# Altium PCB Gator Stream Transmitter.PcbDoc
Units mil, origin at the board's own origin, x right, y up, seen from the top; angles counter-clockwise.
Board outline 5460 x 2325 mil, 2 copper layers (Top Layer, Bottom Layer); 80 components, 301 nets, 556 pads, 175 vias.
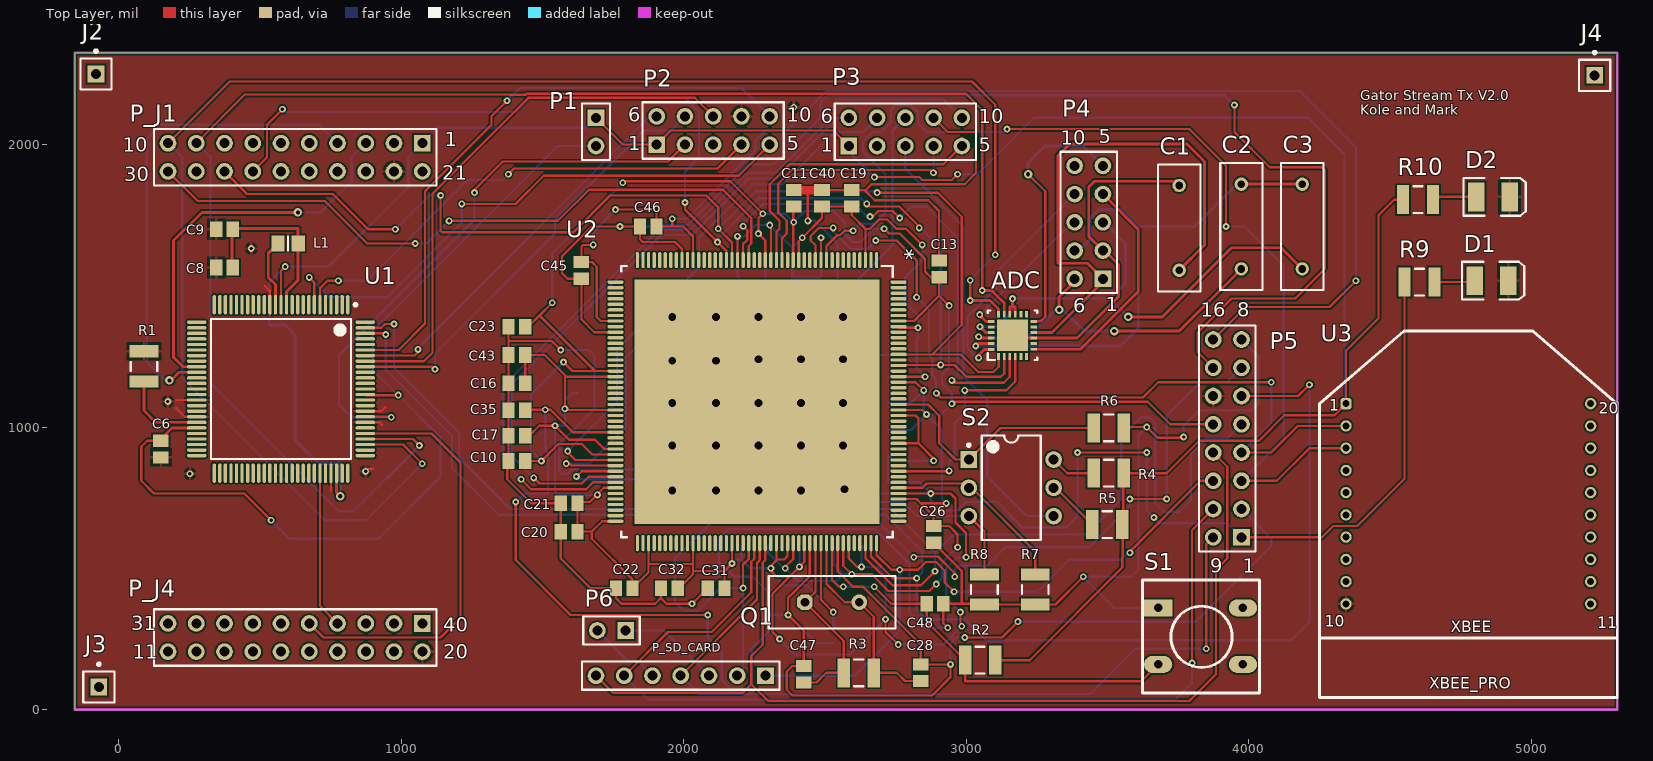
[diagram p0: Top Layer view]
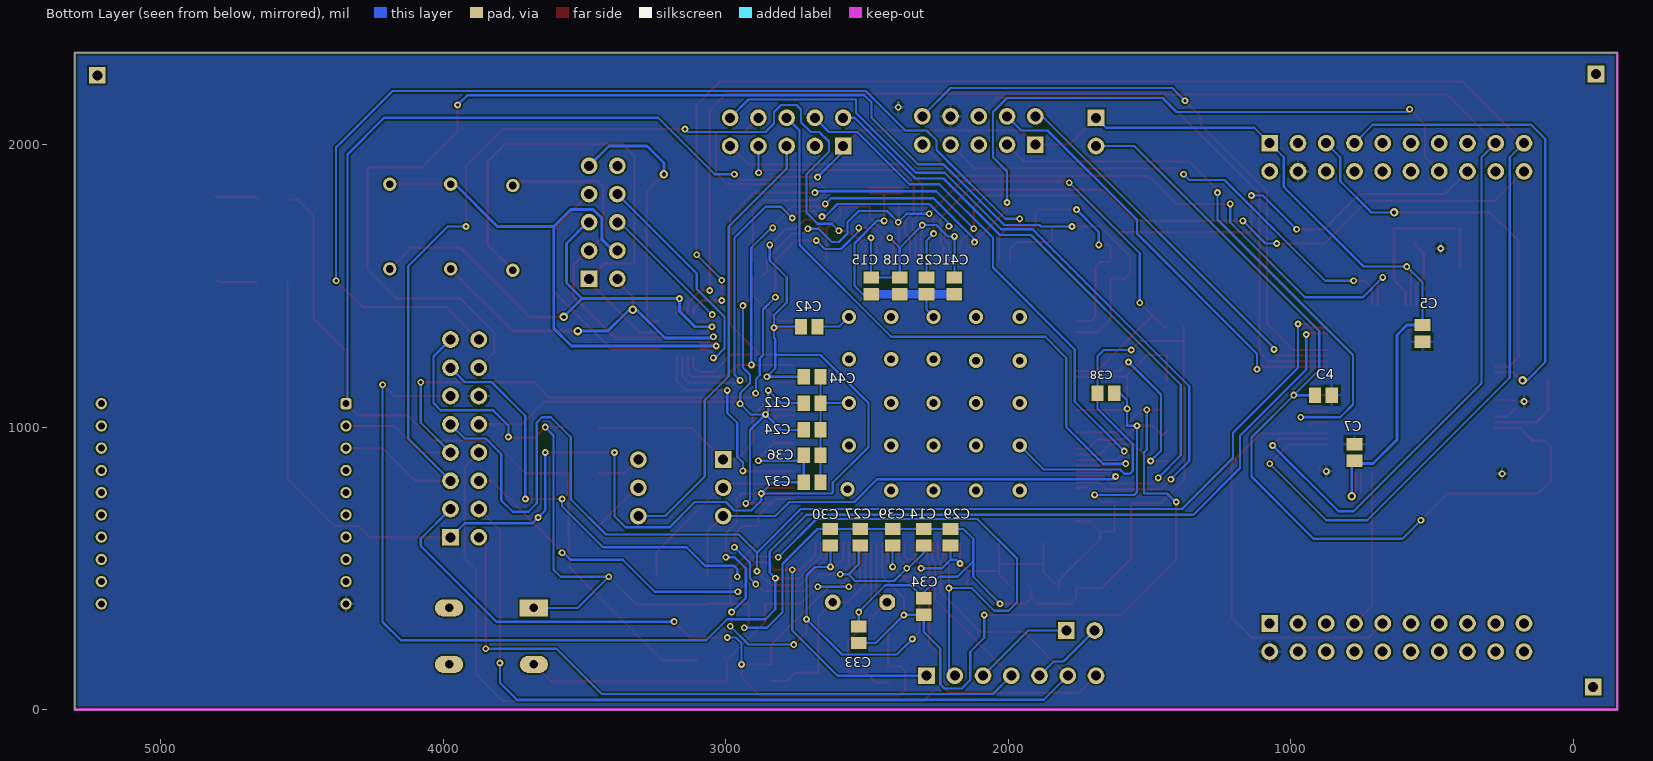
[diagram p1: Bottom Layer view, seen from below]

## Layer stack, top to bottom
Top Solder: solder mask 0.4, Solder Resist, Dk 3.5
Top Layer: signal copper 1.4
Dielectric 1: dielectric 12.6, FR-4, Dk 4.8
Bottom Layer: signal copper 1.4
Bottom Solder: solder mask 0.4, Solder Resist, Dk 3.5

## Board outline
-155,0 -155,2325 5305,2325 5305,0

## Design rules (kind name [scope] priority, off if disabled: settings)
Clearance [InNetClass('All Nets')] p1: gap=6
FabricationTestPointUsage TestPointUsage [All] p1: valid=0 allowmultiple=FALSE
FabricationTestpoint Testpoint [All] p1: side=3 testpointundercomponent=TRUE minsize=40 maxsize=100 preferedsize=60 minholesize=20 maxholesize=40 preferedholesize=32 testpointgrid=1 allowsidetop=TRUE allowsidebottom=TRUE usegrid=TRUE gridtolerance=0.01
HoleSize [All] p1: absolutevalues=TRUE maxlimit=247 minlimit=12 maxpercent=80.000 minpercent=20.000
PasteMaskExpansion PasteMaskExpansion_1 [InComponent('P1')] p1: expansion=-150
PasteMaskExpansion [All] p2: expansion=0
PlaneClearance [All] p1: clearance=5
PlaneConnect [All] p1: planeconnectstyle=Relief reliefexpansion=15 reliefentries=4 reliefconductorwidth=10 reliefairgap=10
PolygonConnect [All] p1: connectstyle=Relief reliefconductorwidth=10 reliefentries=4 polygonreliefangle="90 Angle" airgapwidth=10
RoutingVias RoutingVias_1 [All] p1: holewidth=12 width=24 viastyle="Through Hole" minholewidth=12 minwidth=24 maxholewidth=28 maxwidth=50
RoutingVias [All] p2: holewidth=15 width=30 viastyle="Through Hole" minholewidth=12 minwidth=24 maxholewidth=15 maxwidth=50
SilkToSolderMaskClearance SilkscreenOverComponentPads [IsPad] p1: minsilkscreentomaskgap=10 clearancetoexposedcopper=TRUE
SolderMaskExpansion [All] p1: expansion=5
Width [All] p1: maxlimit=150 minlimit=6 preferedwidth=8
23 further rules are at their usual default settings.

## Classes and differential pairs
component class TMS320F28379D: C10 C11 C12 C13 C14 C15 C16 C17 C18 C19 C20 C21 C22 C23 C24 C25 C26 C27 C28 C29 C30 C31 C32 C33 C34 C35 C36 C37 C38 C39 C40 C41 C42 C43 C44 C45 C46 C47 C48 C? P3 P5 Q1 R2 R3 R4 R5 R6 R7 R8 R? S1 S2 S? U2
component class MSP432: C4 C5 C6 C7 C8 C9 L1 P1 P2 P_J1 P_J4 R1 U1
component class "Audio input ADC": ADC C1 C2 C3 P4
component class "Gator Stream Transmitter Sheet": D1 D2 J2 J3 J4 P6 P_SD_CARD R9 R10 U3

## Components (designator, comment, footprint, x,y, rotation, side; value= is the part's Value field where it differs from the comment)
ADC "TLV320ADC3101IRG" RGE0024F_NV 3164.5,1325 r90 top
C1 "Cap" RAD-0.3 3754.5,1705 r270 top
C2 "Cap" RAD-0.3 3974.5,1710 r270 top
C3 "Cap" RAD-0.3 4189.97,1710 r270 top
C4 "Cap" C0805 885,1113.15 r180 bottom
C5 "C5" C0805 534.35,1331.85 r270 bottom
C6 "Cap" C0805 150,922.36 r270 top
C7 "Cap" C0805 775,910 r90 bottom
C8 "Cap" C0805 375,1565 r0 top
C9 "Cap" C0805 375,1700 r180 top
C10 "Cap" C0805 1410,880 r180 top
C11 "Cap" C0805 2390,1810 r90 top
C12 "Cap" C0805 2695,1085 r180 bottom
C13 "Cap" C0805 2904.5,1560 r90 top
C14 "Cap" C0805 2300,610 r90 bottom
C15 "Cap" C0805 2485,1500 r270 bottom
C16 "Cap" C0805 1410,1155 r180 top
C17 "Cap" C0805 1410,970 r180 top
C18 "Cap" C0805 2385,1500 r270 bottom
C19 "Cap" C0805 2595,1810 r90 top
C20 "Cap" C0805 1595,630 r180 top
C21 "Cap" C0805 1595,730 r180 top
C22 "Cap" C0805 1790,430 r180 top
C23 "Cap" C0805 1410,1355 r180 top
C24 "Cap" C0805 2695,990 r180 bottom
C25 "Cap" C0805 2290,1500 r270 bottom
C26 "Cap" C0805 2885,620 r270 top
C27 "Cap" C0805 2525,610 r90 bottom
C28 "Cap Pol3" C0805 2840,130.47 r270 top
C29 "Cap" C0805 2205,610 r90 bottom
C30 "Cap" C0805 2630,610 r90 bottom
C31 "Cap" C0805 2115,430 r180 top
C32 "Cap" C0805 1950,430 r180 top
C33 "Cap" C0805 2530,265 r90 bottom
C34 "Cap" C0805 2300,365 r90 bottom
C35 "Cap" C0805 1410,1060 r180 top
C36 "Cap" C0805 2695,900 r180 bottom
C37 "Cap" C0805 2695,805 r180 bottom
C38 "Cap" C0805 1655.12,1120 r0 bottom
C39 "Cap" C0805 2410,610 r90 bottom
C40 "Cap" C0805 2490,1810 r90 top
C41 "Cap" C0805 2191.1,1500 r270 bottom
C42 "Cap" C0805 2705,1355.75 r180 bottom
C43 "Cap" C0805 1410,1255.2 r180 top
C44 "Cap" C0805 2695,1178.58 r180 bottom
C45 "Cap" C0805 1638.31,1555 r90 top
C46 "Cap" C0805 1875,1710 r0 top
C47 "Cap Pol3" C0805 2425,125 r270 top
C48 "Cap Pol3" C0805 2890,375 r0 top
D1 "LED3" 3.5X2.8X1.9 4860,1518.15 r0 top
D2 "LED3" 3.5X2.8X1.9 4865,1815 r0 top
J2 "Mounting Hole 1" PIN1 -80,2250 r0 top
J3 "Mounting hole 2" PIN1 -70,80 r0 top
J4 "Mounting Hole 3" PIN1 5225,2245 r0 top
L1 "LQM21PN4R7NGR" 6-0805_N 600,1650 r180 top
P1 "Analog Jumper" HDR1X2 1690,2095 r270 top
P2 "Header 5X2A" HDR2X5_CEN 1905,2000 r0 top
P3 "Header 5X2A" HDR2X5_CEN 2585,1995 r0 top
P4 "Header 5X2A" HDR2X5_CEN 3484.5,1525 r90 top
P5 "Header 8X2A" HDR2X8_CEN 3975,610 r90 top
P6 "SD Power" HDR1X2 1795,280 r180 top
P_J1 "Header 10X2A" HDR2X10_CEN 1075,2005 r180 top
P_J4 "Header 10X2A" HDR2X10_CEN 1075,305 r180 top
P_SD_CARD "Header 7" HDR1X7 2290,120 r180 top
Q1 "10MHZ" HC-49U 2525.75,380 r0 top
R1 "Res3" 14-1210 90,1215 r270 top
R2 "Res3" 14-1210 3050,175 r0 top
R3 "Res3" 14-1210 2620,130 r0 top
R4 "Res3" 14-1210 3505,836.77 r0 top
R5 "Res3" 14-1210 3500,655 r0 top
R6 "Res3" 14-1210 3505,997.2 r180 top
R7 "Res3" 14-1210 3245,425 r90 top
R8 "Res3" 14-1210 3065,425 r90 top
R9 "Res3" 14-1210 4605,1513.23 r180 top
R10 "Res3" 14-1210 4600,1805 r180 top
S1 "SW-PB" "SW PB" 3680,360 r0 top
S2 "SW DIP-3" DIP-6 3160,785 r0 top
U1 "XMS432P401RIPZR" PZ0100A_N 575,1135 r270 top
U2 "TMS320F28379DPTP" PTP0176F_N 2260,1090 r270 top
U3 "XBEE" XBEE/PRO 4310,1515 r0 top

## Footprints (in the part's own frame and the unit in brackets; to place one, negate y for a bottom-side part, rotate by r counter-clockwise, add the part's x,y. Pads: shape width x height; smd on the part's side, far side on the other; paste and mask are expansions set on the pad)
3.5X2.8X1.9 [mm] "SM LED; 2 C-Bend Leads; Body 3.5 x 2.8 x 1.9 mm, inc leads (LxWxH typ)"
  rect 1.5x2.6 smd: 1(-1.5,0) 2(1.5,0)
  silkscreen extent -2.65,-1.7 2.95,1.7
6-0805_N [mm] "Chip Resistor, Body 2.0x1.2mm, IPC Medium Density"
  rect 1.2x1.4 smd: 1(-0.9,0) 2(0.9,0)
  silkscreen extent 0,-0.6 0,0.6, body extent -1.07,-0.7 1.07,0.7, height 0.7
14-1210 [mm] "Chip Resistor, Body 3.2x2.5mm, IPC High Density"
  rect 1.1x2.6 smd: 1(-1.35,0) 2(1.35,0)
  silkscreen extent -0.4,-1.2 0.4,1.2, body extent -1.68,-1.32 1.68,1.32, height 0.9
C0805 [mm] "Chip Capacitor, Body 2.0x1.3mm, IPC High Density"
  rect 1.1x1.4 smd: 1(-0.75,0) 2(0.75,0)
  body extent -1.1,-0.72 1.1,0.72, height 1.4
DIP-6 [mm] "DIP; 6 Leads; Row Spacing 7.62 mm; Pitch 2.54 mm"
  rect 1.5x1.5 hole 0.9: 1(-3.81,2.54)
  round 1.5 hole 0.9: 2(-3.81,0) 3(-3.81,-2.54) 4(3.81,-2.54) 5(3.81,0) 6(3.81,2.54)
  silkscreen extent -3.93,-4.7 2.65,4.7, body extent -3.55,-4.7 3.55,4.7, height 5.46
HC-49U [mm] "Quartz Crystal, Thru-Hole; 2 Leads; Body 11.35 x 4.65 x 13.46 mm (LxWxH max)"
  oct 1.4x1.4 hole 0.8: 1(-2.44,0)
  round 1.4 hole 0.8: 2(2.44,0)
  silkscreen extent -5.7,-2.35 5.7,2.35
HDR1X2 [mm] "Connector; Header; 2 Position"
  rect 1.5x1.5 hole 0.9: 1(0,0)
  round 1.5 hole 0.9: 2(2.54,0)
  silkscreen extent -1.27,-1.27 3.81,1.27
HDR1X7 [mm] "Connector; Header; 7 Position"
  rect 1.5x1.5 hole 0.9: 1(0,0)
  round 1.5 hole 0.9: 2(2.54,0) 3(5.08,0) 4(7.62,0) 5(10.16,0) 6(12.7,0) 7(15.24,0)
  silkscreen extent -1.27,-1.27 16.51,1.27
HDR2X5_CEN [mm] "Connector; Header; 5x2 Position"
  rect 1.5x1.5 hole 0.9: 1(0,0)
  round 1.5 hole 0.9: 2(2.54,0) 3(5.08,0) 4(7.62,0) 5(10.16,0) 6(0,2.54) 7(2.54,2.54) 8(5.08,2.54) 9(7.62,2.54) 10(10.16,2.54)
  silkscreen extent -1.27,-1.27 11.43,3.81
HDR2X8_CEN [mm] "Connector; Header; 8x2 Position"
  rect 1.5x1.5 hole 0.9: 1(0,0)
  round 1.5 hole 0.9: 2(2.54,0) 3(5.08,0) 4(7.62,0) 5(10.16,0) 6(12.7,0) 7(15.24,0) 8(17.78,0) 9(0,2.54) 10(2.54,2.54) 11(5.08,2.54) 12(7.62,2.54) 13(10.16,2.54) 14(12.7,2.54) 15(15.24,2.54) 16(17.78,2.54)
  silkscreen extent -1.27,-1.27 19.05,3.81
HDR2X10_CEN [mm] "Connector; Header; 10x2 Position"
  rect 1.5x1.5 hole 0.9: 1(0,0)
  round 1.5 hole 0.9: 2(2.54,0) 3(5.08,0) 4(7.62,0) 5(10.16,0) 6(12.7,0) 7(15.24,0) 8(17.78,0) 9(20.32,0) 10(22.86,0) 11(0,2.54) 12(2.54,2.54) 13(5.08,2.54) 14(7.62,2.54) 15(10.16,2.54) 16(12.7,2.54) 17(15.24,2.54) 18(17.78,2.54) 19(20.32,2.54) 20(22.86,2.54)
  silkscreen extent -1.27,-1.27 24.13,3.81
PIN1 [mm] "Connector; Plug"
  rect 1.5x1.5 hole 0.9: 1(0,0)
  silkscreen extent -1.4,-1.4 1.4,2.17
PTP0176F_N [mm]
  oval 1.45x0.3 smd paste+0 mask+0.051: 1(-12.725,10.75) 2(-12.725,10.25) 3(-12.725,9.75) 4(-12.725,9.25) 5(-12.725,8.75) 6(-12.725,8.25) 7(-12.725,7.75) 8(-12.725,7.25) 9(-12.725,6.75) 10(-12.725,6.25) 11(-12.725,5.75) 12(-12.725,5.25) 13(-12.725,4.75) 14(-12.725,4.25) 15(-12.725,3.75) 16(-12.725,3.25) 17(-12.725,2.75) 18(-12.725,2.25) 19(-12.725,1.75) 20(-12.725,1.25) 21(-12.725,0.75) 22(-12.725,0.25) 23(-12.725,-0.25) 24(-12.725,-0.75) 25(-12.725,-1.25) 26(-12.725,-1.75) 27(-12.725,-2.25) 28(-12.725,-2.75) 29(-12.725,-3.25) 30(-12.725,-3.75) 31(-12.725,-4.25) 32(-12.725,-4.75) 33(-12.725,-5.25) 34(-12.725,-5.75) 35(-12.725,-6.25) 36(-12.725,-6.75) 37(-12.725,-7.25) 38(-12.725,-7.75) 39(-12.725,-8.25) 40(-12.725,-8.75) 41(-12.725,-9.25) 42(-12.725,-9.75) 43(-12.725,-10.25) 44(-12.725,-10.75) 89(12.725,-10.75) 90(12.725,-10.25) 91(12.725,-9.75) 92(12.725,-9.25) 93(12.725,-8.75) 94(12.725,-8.25) 95(12.725,-7.75) 96(12.725,-7.25) 97(12.725,-6.75) 98(12.725,-6.25) 99(12.725,-5.75) 100(12.725,-5.25) 101(12.725,-4.75) 102(12.725,-4.25) 103(12.725,-3.75) 104(12.725,-3.25) 105(12.725,-2.75) 106(12.725,-2.25) 107(12.725,-1.75) 108(12.725,-1.25) 109(12.725,-0.75) 110(12.725,-0.25) 111(12.725,0.25) 112(12.725,0.75) 113(12.725,1.25) 114(12.725,1.75) 115(12.725,2.25) 116(12.725,2.75) 117(12.725,3.25) 118(12.725,3.75) 119(12.725,4.25) 120(12.725,4.75) 121(12.725,5.25) 122(12.725,5.75) 123(12.725,6.25) 124(12.725,6.75) 125(12.725,7.25) 126(12.725,7.75) 127(12.725,8.25) 128(12.725,8.75) 129(12.725,9.25) 130(12.725,9.75) 131(12.725,10.25) 132(12.725,10.75)
  oval 0.3x1.45 smd paste+0 mask+0.051: 45(-10.75,-12.725) 46(-10.25,-12.725) 47(-9.75,-12.725) 48(-9.25,-12.725) 49(-8.75,-12.725) 50(-8.25,-12.725) 51(-7.75,-12.725) 52(-7.25,-12.725) 53(-6.75,-12.725) 54(-6.25,-12.725) 55(-5.75,-12.725) 56(-5.25,-12.725) 57(-4.75,-12.725) 58(-4.25,-12.725) 59(-3.75,-12.725) 60(-3.25,-12.725) 61(-2.75,-12.725) 62(-2.25,-12.725) 63(-1.75,-12.725) 64(-1.25,-12.725) 65(-0.75,-12.725) 66(-0.25,-12.725) 67(0.25,-12.725) 68(0.75,-12.725) 69(1.25,-12.725) 70(1.75,-12.725) 71(2.25,-12.725) 72(2.75,-12.725) 73(3.25,-12.725) 74(3.75,-12.725) 75(4.25,-12.725) 76(4.75,-12.725) 77(5.25,-12.725) 78(5.75,-12.725) 79(6.25,-12.725) 80(6.75,-12.725) 81(7.25,-12.725) 82(7.75,-12.725) 83(8.25,-12.725) 84(8.75,-12.725) 85(9.25,-12.725) 86(9.75,-12.725) 87(10.25,-12.725) 88(10.75,-12.725) 133(10.75,12.725) 134(10.25,12.725) 135(9.75,12.725) 136(9.25,12.725) 137(8.75,12.725) 138(8.25,12.725) 139(7.75,12.725) 140(7.25,12.725) 141(6.75,12.725) 142(6.25,12.725) 143(5.75,12.725) 144(5.25,12.725) 145(4.75,12.725) 146(4.25,12.725) 147(3.75,12.725) 148(3.25,12.725) 149(2.75,12.725) 150(2.25,12.725) 151(1.75,12.725) 152(1.25,12.725) 153(0.75,12.725) 154(0.25,12.725) 155(-0.25,12.725) 156(-0.75,12.725) 157(-1.25,12.725) 158(-1.75,12.725) 159(-2.25,12.725) 160(-2.75,12.725) 161(-3.25,12.725) 162(-3.75,12.725) 163(-4.25,12.725) 164(-4.75,12.725) 165(-5.25,12.725) 166(-5.75,12.725) 167(-6.25,12.725) 168(-6.75,12.725) 169(-7.25,12.725) 170(-7.75,12.725) 171(-8.25,12.725) 172(-8.75,12.725) 173(-9.25,12.725) 174(-9.75,12.725) 175(-10.25,12.725) 176(-10.75,12.725)
  rect 22x22 smd paste-10.987 mask+0.051: 177(0,0)
  silkscreen extent -12.2,-12.2 12.2,12.2, body extent 0,0 0.25,0.25, height 0.25
PZ0100A_N [mm]
  oval 1.75x0.3 smd paste+0 mask+0.051: 1(-7.575,6) 2(-7.575,5.5) 3(-7.575,5) 4(-7.575,4.5) 5(-7.575,4) 6(-7.575,3.5) 7(-7.575,3) 8(-7.575,2.5) 9(-7.575,2) 10(-7.575,1.5) 11(-7.575,1) 12(-7.575,0.5) 13(-7.575,0) 14(-7.575,-0.5) 15(-7.575,-1) 16(-7.575,-1.5) 17(-7.575,-2) 18(-7.575,-2.5) 19(-7.575,-3) 20(-7.575,-3.5) 21(-7.575,-4) 22(-7.575,-4.5) 23(-7.575,-5) 24(-7.575,-5.5) 25(-7.575,-6) 51(7.575,-6) 52(7.575,-5.5) 53(7.575,-5) 54(7.575,-4.5) 55(7.575,-4) 56(7.575,-3.5) 57(7.575,-3) 58(7.575,-2.5) 59(7.575,-2) 60(7.575,-1.5) 61(7.575,-1) 62(7.575,-0.5) 63(7.575,0) 64(7.575,0.5) 65(7.575,1) 66(7.575,1.5) 67(7.575,2) 68(7.575,2.5) 69(7.575,3) 70(7.575,3.5) 71(7.575,4) 72(7.575,4.5) 73(7.575,5) 74(7.575,5.5) 75(7.575,6)
  oval 0.3x1.75 smd paste+0 mask+0.051: 26(-6,-7.575) 27(-5.5,-7.575) 28(-5,-7.575) 29(-4.5,-7.575) 30(-4,-7.575) 31(-3.5,-7.575) 32(-3,-7.575) 33(-2.5,-7.575) 34(-2,-7.575) 35(-1.5,-7.575) 36(-1,-7.575) 37(-0.5,-7.575) 38(0,-7.575) 39(0.5,-7.575) 40(1,-7.575) 41(1.5,-7.575) 42(2,-7.575) 43(2.5,-7.575) 44(3,-7.575) 45(3.5,-7.575) 46(4,-7.575) 47(4.5,-7.575) 48(5,-7.575) 49(5.5,-7.575) 50(6,-7.575) 76(6,7.575) 77(5.5,7.575) 78(5,7.575) 79(4.5,7.575) 80(4,7.575) 81(3.5,7.575) 82(3,7.575) 83(2.5,7.575) 84(2,7.575) 85(1.5,7.575) 86(1,7.575) 87(0.5,7.575) 88(0,7.575) 89(-0.5,7.575) 90(-1,7.575) 91(-1.5,7.575) 92(-2,7.575) 93(-2.5,7.575) 94(-3,7.575) 95(-3.5,7.575) 96(-4,7.575) 97(-4.5,7.575) 98(-5,7.575) 99(-5.5,7.575) 100(-6,7.575)
  silkscreen extent -7.7,-6.3 6.3,6.83, body extent 0,0 0.25,0.25, height 0.25
RAD-0.3 [mm] "Radial Cap, Thru-Hole; 2 Leads; 0.3 in Pin Spacing"
  round 1.2 hole 0.7: 1(-3.81,0) 2(3.81,0)
  silkscreen extent -5.71,-1.91 5.71,1.91
RGE0024F_NV [mm]
  rect 0.6x0.25 smd paste+0 mask+0: 1(-1.9,1.25) 2(-1.9,0.75) 3(-1.9,0.25) 4(-1.9,-0.25) 5(-1.9,-0.75) 6(-1.9,-1.25) 13(1.9,-1.25) 14(1.9,-0.75) 15(1.9,-0.25) 16(1.9,0.25) 17(1.9,0.75) 18(1.9,1.25)
  rect 0.25x0.6 smd paste+0 mask+0: 7(-1.25,-1.9) 8(-0.75,-1.9) 9(-0.25,-1.9) 10(0.25,-1.9) 11(0.75,-1.9) 12(1.25,-1.9) 19(1.25,1.9) 20(0.75,1.9) 21(0.25,1.9) 22(-0.25,1.9) 23(-0.75,1.9) 24(-1.27,1.905)
  rect 2.8x2.8 smd paste-1.387 mask+0: 25(0,0)
  silkscreen extent -2.22,-2.22 2.23,2.22
"SW PB" [mil]
  rect 100x60 hole 30: 1(0,0)
  oval 100x60 hole 30: 2(0,-200) 3(300,-200) 4(300,0)
  silkscreen extent -55,-302 358,98
XBEE/PRO [mil]
  rrect50% 40x40 hole 25: 1(35,-432.09)
  round 40 hole 25: 2(35,-510.83) 3(35,-589.57) 4(35,-668.31) 5(35,-747.05) 6(35,-825.79) 7(35,-904.53) 8(35,-983.27) 9(35,-1062.01) 10(35,-1140.75) 11(901.14,-1140.75) 12(901.14,-1062.01) 13(901.14,-983.27) 14(901.14,-904.53) 15(901.14,-825.79) 16(901.14,-747.05) 17(901.14,-668.31) 18(901.14,-589.57) 19(901.14,-510.83) 20(901.14,-432.09)
  silkscreen extent -59,-1472 995,-175

## Part data
ADC U1 U2: "Imported"
C1 C2 C3: "Capacitor"
C4 C5 C6 C7 C10 C11 C12 C13 C14 C15 C16 C17 C18 C19 C20 C21 C22 C23 C24 C25 C26 C27 C29 C30 C31 C32 C33 C34 C35 C36 C37 C38 C39 C40 C41 C42 C43 C44 C45 C46: library part "Cap Pol3", "Polarized Capacitor (Surface Mount)"
C8 C9: library part "Cap Semi", "Capacitor (Semiconductor SIM Model)"
C28 C47 C48: "Polarized Capacitor (Surface Mount)"
D1 D2: "Typical BLUE SiC LED"
J2 J3 J4: library part Socket, "Socket"
L1: library part Inductor, "Inductor"
P1 P6: library part "Header 2", "Header, 2-Pin"
P2 P3 P4: "Header, 5-Pin, Dual row"
P5: "Header, 8-Pin, Dual row"
P_J1 P_J4: "Header, 10-Pin, Dual row"
P_SD_CARD: "Header, 7-Pin"
Q1: library part ECS-10-13-1, "Crystal Oscillator"
R1 R2 R3 R4 R5 R6 R7 R8 R9 R10: "Resistor"
S1: library part SW-PB_2, "DIGIKEY SW400-ND"
S2: "DIP Switch, 3 Position, SPST"

## Via types
v1: diameter 24, hole 12, Top Layer to Bottom Layer, 143 vias
v2: diameter 50, hole 28, Top Layer to Bottom Layer, 25 vias
v3: diameter 30, hole 15, Top Layer to Bottom Layer, 7 vias

## Nets (pads, with @x,y where several pads share a name; then routed paths per layer and width w, separated by ;. In a path a pad name is that pad's centre, name@x,y a point inside that pad or via, vN(x,y) a via of type N, cw(c..) or ccw(c..) an arc to the next point about the centre after c; other vN are vias at no path point)
3V3: C5.1 C7.1 P1.1 P2.1 P3.1 P_J1.1 R2.2 R4.2 R5.2 R10.2 U1.13 U1.73 U3.1 | length 9070.9
  Top Layer w8: U1.13 575,1553.19 v1(590,1568.19) ; P1.1 1785,2000 P2.1 1955,2050 2530,2050 P3.1 ; v1(2675.47,1885) 2834.53,1885 2844.8,1874.73 2949.73,1874.73 v1(2970,1895) ; R2.2 3225,175 3553.15,503.15 3556.3,650.51 R4.2@3556.3,827.28 ; R4.2 3710,836.77 3825.12,951.89 4036.89,951.89 4126.76,1041.76 4303.84,1041.76 U3.1 4345,1270 4460,1385 4460,1750 4515,1805 R10.2
  Top Layer w10: U1.73 771.85,768.15 v3(784.75,755.25)
  Bottom Layer w8: C5.1 534.35,1512.54 v1(590,1568.19) 743.19,1568.19 1025,1850 1025,1955 P_J1.1 1130,2060 1655,2060 P1.1 ; P3.1 2585,1975.47 v1(2675.47,1885) ; v1(2970,1895) 3040,1895 3240,2095 4210,2095 4340,1965 4340,1087.91 U3.1
  Bottom Layer w10: C5.1 590,1361.38 625,1326.38 625,955 709.28,870.72 784.75,870.72 v3(784.75,755.25)
5V: P_J1.11
ADC_AVDD: ADC.10 C1.2 P4.1 | length 1875.4
  Top Layer w10: ADC.10 3304.34,1334.84 P4.1@3489.5,1520 ; P4.1 3429.5,1580 3324.5,1580 3324.5,1960 3367,2002.5 3782,2002.5 3844.5,1940 3844.5,1645 C1.2
ADC_DVDD: ADC.22 C2.2 P4.6 | length 1260.6
  Top Layer w10: v1(3044.5,1320) 3049.5,1315 ADC.22@3089.54,1315 ; v3(3329.5,1415) 3329.5,1460 P4.6@3389.5,1520 ; v3(3524.5,1340) 3754.5,1340 C2.2
  Bottom Layer w10: v1@3054.5,1315 3215.64,1315 3315.64,1415 v3(3329.5,1415) 3343.36,1415 3418.36,1340 v3(3524.5,1340)
ADC_GPIO: ADC.19 P4.8 | length 523.5
  Top Layer w10: v1(3048.65,1398.09) 3048.65,1395.85 3070.28,1374.21 ADC.19
  Bottom Layer w8: v1(3048.65,1398.09) 3375.56,1725 P4.8
ADC_IOVDD: ADC.15 ADC.16 ADC.21 C3.2 P4.3 | length 1839.6
  Top Layer w10: v1(3049.5,1355) 3069.65,1334.84 ADC.21 ; ADC.16 3154.65,1424.84 3174.18,1424.84 ADC.15@3174.18,1399.96 ; 3164.5,1424.92 v1(3164.5,1455) ; v3(3574.5,1390) 3694.5,1390 3939.5,1635 4114.97,1635 C3.2
  Bottom Layer w10: v1(3049.5,1355) 3109.5,1355 3164.5,1410 v1(3164.5,1455) 3509.5,1455 ; P4.3@3489.5,1725 3564.5,1650 3564.5,1510 3509.5,1455 ; v3(3574.5,1390) 3509.5,1455
ADC_MCLK: ADC.24 P4.9 | length 820.1
  Top Layer w10: v1(3044.5,1245) 3044.5,1255 3064.5,1275 ADC.24
  Bottom Layer w8: v1(3044.5,1245) 3039,1245 3005,1279 3005,1390.24 3103.33,1488.57 3103.33,1543.84 P4.9
ADC_RESET: ADC.4 U2.142 | length 768.5
  Top Layer w8: U2.142 2938.94,843.94 v1(2940,845) ; v1(2995,1130) 3143.15,1130 3174.34,1161.19 ADC.4
  Bottom Layer w8: v1(2940,845) 2940,875 2960,895 2960,1015 2995,1050 v1(2995,1130)
AUDIO_L: ADC.7 P4.4 | length 844.5
  Top Layer w10: ADC.7 3405.28,1275.79 3609.5,1480 3609.5,1700 P4.4@3489.5,1820
AUDIO_R: ADC.12 P4.5 | length 935.9
  Top Layer w8: v3(3219.5,1895) 3280,1834.5 3280,1390.5 3263.71,1374.21 ADC.12
  Bottom Layer w10: v3(3219.5,1895) 3219.5,1935 3279.5,1995 3414.5,1995 P4.5
AVSS: ADC.9 ADC.25 C1.1 P4.2 | length 1190.2
  Top Layer w10: ADC.25@3174.34,1315.16 ADC.9 3393.12,1315.16 3539.5,1461.54 3539.5,1575 P4.2@3489.5,1625 ; P4.2 3434.5,1675 3434.5,1850 3454.5,1870 3739.5,1870 C1.1
BT_I2S_DOUT: P_J1.20 U2.24 | length 2443.7
  Top Layer w8: P_J1.20 280,1800 730,1800 880,1650 v1(1050,1650) ; v1(1170,1730) 1555,1730 1665,1840 2140,1840 2240,1740 2240,1649.53 2230.47,1640 U2.24
  Bottom Layer w8: v1(1050,1650) 1090,1650 v1(1170,1730)
BT_NSHUTD2: U1.21
DSC_SD_CS: P5.12 P_SD_CARD.7 U2.112 | length 3638.3
  Top Layer w8: P_SD_CARD.7 1750,60 2210,60 2240,90 ; U2.112 2289.53,529.68 2280,520.16 2280,229.84 2240,189.84 2240,90 ; P5.12 3925,860 3925,535 3885,495 3885,125 3790,30 2300,30 2240,90
DSC_SD_DIN: P5.7 P_SD_CARD.2 U2.109 | length 3600.8
  Top Layer w8: v1(2210.79,430) 2210.79,513.74 2230.47,533.43 U2.109 ; v1(2815,539.53) 2812.24,542.24 2900.39,542.24 2960,482.64 v1(2960,470) ; v1(3580,745.51) 3708.98,745.51 3709.49,745 v1(3710,745.51)
  Bottom Layer w8: P_SD_CARD.2 2210.79,140.79 v1(2210.79,430) 2130,430 2050,350 2000,350 1970,380 1970,535 2110,675 2679.53,675 v1(2815,539.53) ; v1(2960,470) 2960,497.63 2971.58,509.21 3074.21,509.21 3140,575 3435,575 3580,720 v1(3580,745.51) ; v1(3710,745.51) 3710,1040 3830,1160 3925,1160 P5.7
DSC_SD_DOUT: P5.10 P_SD_CARD.6 U2.110 | length 3466.5
  Top Layer w8: P_SD_CARD.6 1945,275 2100,275 2240,415 2240,522.95 2250.16,533.11 U2.110 ; v1(3800,165) 3800,635 P5.10
  Bottom Layer w8: P_SD_CARD.6 1875,35 3740,35 3800,95 v1(3800,165)
DSC_SD_PRESENT: P5.11 P_SD_CARD.1 U2.132 | length 2263.1
  Top Layer w8: U2.132 2683.23,547.56 2735.79,495 v1(2765,495) 2830,495 2857.32,522.32 2894.09,522.32 2925,491.42 2925,450 v1(2957.79,417.21) ; v1(3580,555) 3580,560 3830,810 P5.11
  Bottom Layer w8: P_SD_CARD.1 2605,120 2765,280 v1(2765,495) ; v1(2957.79,417.21) 3252.21,417.21 3365,530 3550,530 3580,560 v1(3580,555)
DSC_SD_SCLK: P5.9 P_SD_CARD.4 U2.111 | length 2943.5
  Top Layer w8: P_SD_CARD.4 2260,390 2260,518.54 2266,524.54 2266,525.96 2269.84,529.8 U2.111 ; v1(3850,215) 3850,585 P5.9
  Bottom Layer w8: P_SD_CARD.4 2055,55 3440,55 3600,215 v1(3850,215)
DSC_X1: C28.2 Q1.2 R3.2 U2.123 | length 737.2
  Top Layer w8: U2.123 2506.06,444.37 2570.43,380 Q1.2 2673.15,328.66 R3.2 2755,130 2784.06,100.94 C28.2
DSC_X2: C47.2 Q1.1 R3.1 U2.121 | length 687.3
  Top Layer w8: C47.2 2470.47,95.47 2505,130 R3.1 2566.85,242.83 Q1.1 2466.69,417.01 U2.121
DVSS: ADC.23 C2.1 C3.1 P4.7 | length 2011.9
  Top Layer w10: v1(3034.5,1287.17) 3042.8,1295.47 ADC.23 ; C2.1 C3.1
  Bottom Layer w10: v1(3034.5,1287.17) 3542.33,1287.17 ; P4.7@3389.5,1620 3394.5,1620 3439.5,1665 3439.5,1740 3469.5,1770 3549.5,1770 3609.5,1710 ; 3544.5,1285 3609.5,1350 3609.5,1710 ; C2.1 3959.5,1860 3809.5,1710 3609.5,1710
GND: C4.2 C5.2 C6.2 C7.2 C8.1 C9.2 D1.2 D2.2 P2.9 P5.14 P_J1.12 P_J4.11 R1.1 U1.15 U1.40 U1.43 U1.72 U1.82 U1.84 U3.10 | length 521
  Top Layer w8: 204.06,1067.07 234.56,1036.57 U1.43 ; 204.06,1095.63 U1.40 ; 516.42,1500 535.63,1480.79 U1.15 ; 752.17,773.75 U1.72 ; U1.82 924.29,1016.89 932.49,1008.69 ; U1.84 930.27,1056.26 944.04,1070.03 ; v1(874.51,843.24) 884.03,852.77 902.4,852.77
  Top Layer w10: 534.35,1469.4 534.35,1434.51 U1.15
  Bottom Layer w8: v1(2390,2132.47) 2390,2150
  other v1: 252.54,835 174.61,1090.75 470,1632.1
GPIO_72: R7.2 S2.2 U2.139 | length 671.5
  Top Layer w8: U2.139 2844.88,784.88 2860,800 2995,800 S2.2 3020,785 3245,560 R7.2
GPIO_84: R6.2 S2.1 U2.154 | length 875.1
  Top Layer w8: U2.154 2864.84,1080.16 2905,1040 2905,942.83 2962.83,885 S2.1 3122.2,997.2 R6.2
I2S_BCLK: ADC.1 P_J1.18 U2.27 U2.163 | length 4197.2
  Top Layer w8: P_J1.18 455,1825 758.27,1825 883.27,1700 v1(980,1700) ; v1(1140,1820) 1140,1695 1145,1690 1610,1690 1740,1820 2080,1820 2122.8,1777.2 v1(2122.8,1702.2) 2171.42,1653.58 U2.27 ; v1(2685,1830) 2900,1830 2984.97,1745.03 2984.97,1362.29 2880,1257.32 ; U2.163 2880,1257.32 ; ADC.1 3115.28,1214.06 3096.23,1195 3043.11,1195 2980.79,1257.32 2880,1257.32
  Bottom Layer w8: v1(980,1700) 1100,1820 v1(1140,1820) ; v1(2122.8,1702.2) 2255.59,1835 2680,1835 v1(2685,1830)
I2S_DATA: ADC.3 U2.25 | length 1844.7
  Top Layer w8: U2.25 2210.79,1648.43 2225,1662.64 2225,1696.57 v1(2210.79,1710.79) ; v1(2660,1745) 2670,1745 2690,1765 2740,1765 v1(2765,1740) ; v1(2950,1165.27) 2958.27,1157 3133.07,1157 3154.65,1178.58 ADC.3
  Bottom Layer w8: v1(2210.79,1710.79) 2200.79,1710.79 2280,1790 2605,1790 2650,1745 v1(2660,1745) ; v1(2765,1740) 2805,1780 2860,1780 2970,1670 2970,1185.27 v1(2950,1165.27)
I2S_FS: ADC.2 P_J1.17 U2.28 U2.161 | length 4197.4
  Top Layer w8: P_J1.17 525,1955 525,2070 v1(580,2125) ; v1(2005,1795) 2005,1770 2151.73,1623.27 U2.28 ; v1(2648.15,1790) 2657.04,1781.11 2763.89,1781.11 2834.53,1710.47 v1(2834.53,1705) ; U2.161 2763.03,1220 v1(2910,1220) 2959.5,1220 3001.25,1178.25 3123.25,1178.25 3134.97,1189.97 ADC.2
  Bottom Layer w8: v1(580,2125) 590,2115 1405,2115 1454.8,2164.8 2005.2,2164.8 2055,2115 2055,1955 2005,1905 v1(2005,1795) ; v1(2120,1655) 2120,1665 2265,1810 2628.15,1810 v1(2648.15,1790) ; v1(2834.53,1705) 2840,1705 2910,1635 v1(2910,1220)
JTAG_TRST_DSC: P3.3 S2.4 | length 1583.1
  Bottom Layer w8: P3.3 2785,1915 2990,1710 2990,1180 3075,1095 3075,825 3215,685 S2.4
MSP_AVCC: C4.1 C6.1 P1.2 U1.45 U1.87 | length 3455
  Top Layer w8: C6.1 143.78,951.89 101.89,951.89 80,930 80,810.51 125.51,765 445,765 v1(540,670) ; U1.87@873.54,1115 875.39,1113.15 v1(990,1113.15)
  Top Layer w10: C6.1@143.78,951.89 189.09,997.2 U1.45
  Bottom Layer w8: v1(540,670) 605,605 920,605 1140,825 1140,963.15 v1(990,1113.15) ; C4.1 v1(990,1113.15) ; P1.2 1555,1995 900,1340 900,1203.15 v1(990,1113.15)
MSP_SCL: ADC.17 P_J1.9 U1.79 | length 5749.6
  Top Layer w8: P_J1.9 447,2177 1384.11,2177 1385.11,2176 1441.2,2176 1445.01,2179.8 2999.69,2179.8 3057.64,2121.86 v1(3057.64,1483.7) ; U1.79 1042.17,957.83 v1(1065,935)
  Top Layer w10: v1(3057.64,1483.7) 3090.8,1483.7 3099.5,1475 3134.97,1439.53 ADC.17
  Bottom Layer w8: P_J1.9 325,1955 325,1155 778.15,701.85 831.85,701.85 v1(1065,935)
MSP_SDA: ADC.18 P_J1.10 U1.78 | length 6136.6
  Top Layer w8: P_J1.10 393.7,2223.7 3020.96,2223.7 3103.15,2141.51 v1(3103.15,1610) ; U1.78 1006.85,938.15 v1(1075,870) ; v1(3014.5,1520) 3014.5,1448.38 v1(3014.59,1448.28)
  Top Layer w10: v1(3014.59,1448.28) 3084.48,1448.28 3115.28,1417.48 ADC.18
  Bottom Layer w8: P_J1.10 225,1955 225,1175 730,670 875,670 v1(1075,870) ; v1(3014.5,1520) 3014.5,1521.35 v1(3103.15,1610)
NetADC_5: ADC.5
NetADC_6: ADC.6
NetADC_13: ADC.13
NetC48_1: C48.1 R2.1 S1.2 U2.124 | length 1538.3
  Top Layer w8: U2.124 2525.75,459.25 2550,435 v1(2565,435) ; v1(2675,435) 2735,375 C48.1 2860.47,311.38 R2.1 2996.85,100.44 3620.44,100.44 S1.2
  Bottom Layer w8: v1(2565,435) v1(2675,435)
NetD1_1: D1.1 R9.1 | length 144.8
  Top Layer w8: R9.1 4796.02,1513.23 D1.1
NetD2_1: D2.1 R10.1 | length 156.9
  Top Layer w8: R10.1 4663.15,1815 D2.1
NetJ2_1: J2.1
NetJ3_1: J3.1
NetJ4_1: J4.1
NetJ5_1: 
NetP2_3: P2.3
NetP3_2: P3.2
NetP4_10: P4.10
NetP_J1_2: P_J1.2
NetP_J1_5: P_J1.5
NetP_J1_6: P_J1.6
NetP_J1_7: P_J1.7
NetP_J1_8: P_J1.8
NetP_J1_13: P_J1.13
NetP_J1_14: P_J1.14
NetP_J1_15: P_J1.15
NetP_J1_16: P_J1.16
NetP_J1_19: P_J1.19
NetP_J4_1: P_J4.1
NetP_J4_2: P_J4.2
NetP_J4_3: P_J4.3
NetP_J4_6: P_J4.6
NetP_J4_7: P_J4.7
NetP_J4_8: P_J4.8
NetP_J4_9: P_J4.9
NetP_J4_10: P_J4.10
NetP_J4_12: P_J4.12
NetP_J4_13: P_J4.13
NetP_J4_14: P_J4.14
NetP_J4_16: P_J4.16
NetP_J4_17: P_J4.17
NetP_J4_18: P_J4.18
NetP_J4_19: P_J4.19
NetP_J4_20: P_J4.20
NetR1_2: R1.2 U1.44 | length 307.3
  Top Layer w10: R1.2 90,1058.62 131.73,1016.89 U1.44
NetR4_1: R4.1 S2.6 | length 161.8
  Top Layer w8: S2.6 3358.23,836.77 R4.1
NetR5_1: R5.1 S2.5 | length 190.7
  Top Layer w8: S2.5 3316.85,785 R5.1
NetU1_1: U1.1
NetU1_2: U1.2
NetU1_3: U1.3
NetU1_4: U1.4
NetU1_5: U1.5
NetU1_8: U1.8
NetU1_9: U1.9
NetU1_10: U1.10
NetU1_11: U1.11
NetU1_16: U1.16
NetU1_17: U1.17
NetU1_18: U1.18
NetU1_19: U1.19
NetU1_20: U1.20
NetU1_22: U1.22
NetU1_23: U1.23
NetU1_24: U1.24
NetU1_25: U1.25
NetU1_26: U1.26
NetU1_27: U1.27
NetU1_28: U1.28
NetU1_29: U1.29
NetU1_30: U1.30
NetU1_31: U1.31
NetU1_32: U1.32
NetU1_33: U1.33
NetU1_36: U1.36
NetU1_37: U1.37
NetU1_38: U1.38
NetU1_39: U1.39
NetU1_41: U1.41
NetU1_42: U1.42
NetU1_46: U1.46
NetU1_47: U1.47
NetU1_48: U1.48
NetU1_49: U1.49
NetU1_50: U1.50
NetU1_51: U1.51
NetU1_52: U1.52
NetU1_53: U1.53
NetU1_54: U1.54
NetU1_55: U1.55
NetU1_56: U1.56
NetU1_57: U1.57
NetU1_58: U1.58
NetU1_59: U1.59
NetU1_60: U1.60
NetU1_61: U1.61
NetU1_62: U1.62
NetU1_63: U1.63
NetU1_64: U1.64
NetU1_65: U1.65
NetU1_66: U1.66
NetU1_67: U1.67
NetU1_68: U1.68
NetU1_69: U1.69
NetU1_71: U1.71
NetU1_74: U1.74
NetU1_75: U1.75
NetU1_76: U1.76
NetU1_77: U1.77
NetU1_81: U1.81
NetU1_85: U1.85
NetU1_86: U1.86
NetU1_88: U1.88
NetU1_89: U1.89
NetU1_90: U1.90
NetU1_91: U1.91
NetU1_96: U1.96
NetU1_97: U1.97
NetU1_100: U1.100
NetU2_1: U2.1
NetU2_2: U2.2
NetU2_4: U2.4
NetU2_5: U2.5
NetU2_6: U2.6
NetU2_7: U2.7
NetU2_8: U2.8
NetU2_9: U2.9
NetU2_13: U2.13
NetU2_14: U2.14
NetU2_17: U2.17
NetU2_22: U2.22
NetU2_23: U2.23
NetU2_29: U2.29
NetU2_30: U2.30
NetU2_31: U2.31
NetU2_32: U2.32
NetU2_33: U2.33
NetU2_35: U2.35
NetU2_37: U2.37
NetU2_38: U2.38
NetU2_39: U2.39
NetU2_40: U2.40
NetU2_41: U2.41
NetU2_42: U2.42
NetU2_43: U2.43
NetU2_44: U2.44
NetU2_45: U2.45
NetU2_46: U2.46
NetU2_47: U2.47
NetU2_48: U2.48
NetU2_49: U2.49
NetU2_50: U2.50
NetU2_51: U2.51
NetU2_53: U2.53
NetU2_55: U2.55
NetU2_56: U2.56
NetU2_57: U2.57
NetU2_58: U2.58
NetU2_59: U2.59
NetU2_60: U2.60
NetU2_63: U2.63
NetU2_64: U2.64
NetU2_65: U2.65
NetU2_66: U2.66
NetU2_67: U2.67
NetU2_69: U2.69
NetU2_70: U2.70
NetU2_71: U2.71
NetU2_73: U2.73
NetU2_74: U2.74
NetU2_83: U2.83
NetU2_84: U2.84
NetU2_85: U2.85
NetU2_86: U2.86
NetU2_87: U2.87
NetU2_89: U2.89
NetU2_90: U2.90
NetU2_92: U2.92
NetU2_93: U2.93
NetU2_94: U2.94
NetU2_95: U2.95
NetU2_96: U2.96
NetU2_97: U2.97
NetU2_98: U2.98
NetU2_100: U2.100
NetU2_101: U2.101
NetU2_102: U2.102
NetU2_103: U2.103
NetU2_104: U2.104
NetU2_105: U2.105
NetU2_107: U2.107
NetU2_108: U2.108
NetU2_113: U2.113
NetU2_115: U2.115
NetU2_118: U2.118
NetU2_128: U2.128
NetU2_129: U2.129
NetU2_133: U2.133
NetU2_134: U2.134
NetU2_135: U2.135
NetU2_136: U2.136
NetU2_140: U2.140
NetU2_141: U2.141
NetU2_143: U2.143
NetU2_144: U2.144
NetU2_145: U2.145
NetU2_146: U2.146
NetU2_148: U2.148
NetU2_149: U2.149
NetU2_150: U2.150
NetU2_151: U2.151
NetU2_155: U2.155
NetU2_156: U2.156
NetU2_157: U2.157
NetU2_160: U2.160
NetU2_162: U2.162
NetU2_164: U2.164
NetU2_165: U2.165
NetU2_166: U2.166
NetU2_167: U2.167
NetU2_170: U2.170
NetU2_171: U2.171
NetU2_172: U2.172
NetU2_173: U2.173
NetU2_174: U2.174
NetU2_175: U2.175
NetU2_176: U2.176
NetU3_4: U3.4
NetU3_5: U3.5
NetU3_6: U3.6
NetU3_7: U3.7
NetU3_8: U3.8
NetU3_9: U3.9
NetU3_11: U3.11
NetU3_12: U3.12
NetU3_13: U3.13
NetU3_14: U3.14
NetU3_15: U3.15
NetU3_16: U3.16
NetU3_17: U3.17
NetU3_18: U3.18
NetU3_19: U3.19
NetU3_20: U3.20
RESET: P_J4.15
SD_GND: P6.2 P_SD_CARD.5 | length 261.3
  Bottom Layer w8: P6.2 1805,170 1840,170 P_SD_CARD.5
SD_VCC: P6.1 P_SD_CARD.3 | length 361.3
  Bottom Layer w8: P6.1 1930,280 P_SD_CARD.3
TCK_DSC: P3.10 U2.81 | length 2815.4
  Top Layer w8: v1(1425,815) 1460,780 1655.12,780 1679.69,804.57 U2.81
  Bottom Layer w8: v1(1425,815) 1360,880 1360,1145 1915,1700 2025,1700 2225,1900 2326.88,1900 2540,2113.12 2540,2160 2920,2160 P3.10
TCK_MSP: P2.10 U1.95 | length 2149.3
  Top Layer w8: U1.95 991.42,1272.8 1085,1366.38 1085,1835 1320,2070 1320,2100 v1(1375,2155)
  Bottom Layer w8: v1(1375,2155) 1420,2200 2205,2200 P2.10
TDI_DSC: P3.7 U2.77 | length 1938.7
  Top Layer w8: v1(1590,915) 1590,910 1616.69,883.31 U2.77
  Bottom Layer w8: v1(1590,915) 1765,1090 1765,1275 2055,1565 2055,1670 2245,1860 2350,1860 2535,2045 2635,2045 P3.7
TDI_MSP: P2.7 U1.92 | length 1568.5
  Top Layer w8: U1.92 1111.26,1213.74 v1(1120,1205)
  Top Layer w10: U1.92 U1.92@874.51,1215.02
  Bottom Layer w8: v1(1120,1205) 1120,1259.69 1545.31,1685 1545.31,1733.69 1861.63,2050 1955,2050 P2.7
TDO_DSC: P3.8 U2.78 | length 2265.4
  Top Layer w8: v1(1585,870.72) 1596.52,870.72 1603.62,863.62 U2.78
  Bottom Layer w8: v1(1585,870.72) 1585.72,870 1665,870 1795,1000 1795,1245 1870,1320 2415,1320 2740,1645 2740,2050 P3.8
TDO_MSP: P2.8 U1.93 | length 1976.7
  Top Layer w8: U1.93 1081.1,1233.43 1111.26,1263.58 1111.26,1826.26 1450.8,2165.8 2039.2,2165.8 P2.8
  Top Layer w10: U1.93 U1.93@874.51,1234.7
TMS_DSC: P3.6 U2.80 | length 2256.9
  Top Layer w8: v1(1470,820) 1490,800 1640,800 1664.25,824.25 U2.80
  Bottom Layer w8: v1(1470,820) 1390,900 1390,1150 1920,1680 2030,1680 2230,1880 2330,1880 2545,2095 P3.6
TMS_GND: C10.2 C11.2 C12.2 C13.2 C14.2 C15.2 C16.2 C17.2 C18.2 C19.2 C20.2 C21.2 C22.2 C23.2 C24.2 C25.2 C26.2 C27.2 C29.2 C30.2 C31.2 C32.2 C33.2 C34.2 C35.2 C36.2 C37.2 C38.2 C39.2 C40.2 C41.2 C42.2 C43.2 C44.2 C48.2 P3.9 P5.8 R6.1 R7.1 R8.1 S1.1 U2.122 U2.177 | length 10682.5
  Top Layer w8: C10.2@1375.47,880 1375.47,815 1460.47,730 C21.2 C20.2 1565.47,534.53 1670,430 C22.2 1760.47,395 1780.47,375 1900,375 1920.47,395.47 ; C10.2 C17.2 C35.2 C43.2 1380.47,1305.1 ; C23.2 1380.47,1305.1 ; v1(1565.47,1272.8) 1533.17,1305.1 1380.47,1305.1 ; C32.2 1920.47,395.47 ; C31.2 2030.47,375 v1(2030,375) 1940,375 1920.47,394.53 1920.47,395.47 ; v1(2440,1730) 2440,1839.06 ; U2.122 2486.38,388.62 v1(2530,345) ; C40.2 C19.2 2640.47,1839.53 ; C26.2 2985,490.47 2985,376.89 2983.11,375 ; P3.9 2935,2045 3030,2045 3035,2040 3035,1900 2995,1860 2665,1860 2644.53,1839.53 2640.47,1839.53 ; C13.2 2904.5,1765 2866.5,1803 2677,1803 2640.47,1839.53 ; v1(2935,290) 2919.53,305.47 C48.2 2983.11,375 ; R8.1@3058.15,375 2983.11,375 ; R8.1 R7.1 3316.85,371.85 v1(3415,470) ; R6.1 3560.94,1000 v1(3640,1000) 3677.95,962.05 3767.05,962.05 v1(3770,965)
  Top Layer w30: C11.2@2385,1839.06 2440,1839.06 C40.2@2485,1839.06
  Bottom Layer w8: v1(1565.47,1272.8) 1662.2,1272.8 1684.65,1250.35 C38.2 1684.65,1064.65 1560,940 1560,845 1570,835 1590,835 1605,850 1875,850 v2(1960,935) ; v1(2030,375) 2125,470 2125,525 ; v2(2265,1390) 2290,1415 C25.2 ; v1(2440,1730) 2465,1730 2545,1650 2545,1500 2515.47,1470.47 C15.2 ; C33.2 v1(2530,345) ; v1@2530,346.38 2436.38,440 2345.47,440 C34.2 2300,415 2245,470 2180,470 2125,525 ; v2(2565,1085) C12.2 ; v2(2565,1390) 2599.25,1355.75 C42.2 ; C37.2 C36.2 C24.2 C12.2 ; C44.2 C12.2 ; v1(2935,290) 2855,290 2800,345 2800,515 2675.47,639.53 C30.2 C27.2 C39.2 C14.2 C29.2 2159.53,639.53 2125,605 2125,525 ; v1(3640,1000) 3610,970 3610,495 3585,470 v1(3415,470) 3525,360 S1.1 ; v1(3770,965) 3770,1005 3825,1060 4010,1060 4035,1085 4035,1250 P5.8
  Bottom Layer w30: C41.2@2195,1470.47 C25.2 C18.2 C15.2
  other v2: 1960,775 2115,775 2265,775 2415,775 2570,780 2115,935 2265,935 2415,935 2565,935 1960,1085 2115,1085 2265,1085 2415,1085 1960,1235 2115,1235 2265,1240 2415,1240 2565,1240 1960,1390 2115,1390 2415,1390
TMS_MSP: P2.6 U1.94 | length 1398.4
  Top Layer w8: U1.94 1048.11,1253.11 1060,1265 v1(1060,1275)
  Bottom Layer w8: v1(1060,1275) 1055,1275 1880,2100 P2.6
TMS_VDD: C10.1 C11.1 C12.1 C13.1 C14.1 C23.1 C24.1 C25.1 C26.1 C27.1 P5.13 U2.16 U2.21 U2.61 U2.76 U2.117 U2.126 U2.137 U2.153 U2.158 U2.169 | length 8112.9
  Top Layer w8: C10.1@1434.53,900 C10.1@1439.53,900 ; C10.1 v1(1496.69,880) 1556.69,940 1640,940 1677.01,902.99 U2.76 ; C23.1 1450,1355 1490,1395 ; v1(1535,1440) 1490,1395 ; v1(1575,1230) 1606.73,1198.27 1686.73,1198.27 ; U2.61 1686.73,1198.27 ; v1(1785,1865) 1790,1870 2165,1870 v1(2280,1755) 2265,1740 v1(2265,1685) 2289.53,1660.47 U2.21 ; v1(2360,500) 2355,500 2387.95,532.95 U2.117 ; U2.16 v1@2387.95,1725 ; v1(2390,1725) v1@2387.95,1725 ; C11.1 2387.95,1778.43 v1@2387.95,1725 ; U2.126 2565.12,508.98 v1(2595,479.09) 2665.91,479.09 2725,420 2870,420 v1(2894.37,444.37) ; v1(2710,1702.2) 2727.2,1685 2765,1685 2855,1595 2855,1550.47 2875,1530.47 ; U2.137 2824.49,745.51 2840,730 ; U2.153 2844.53,1060.47 v1(2860,1045) ; U2.158 2821.1,1158.9 v1(2850,1130) ; U2.169 2815.43,1375.43 2904.5,1464.5 ; C13.1 2904.5,1464.5 ; v1(2930,730) 2840,730 ; v1(2940,1430) 2938.99,1430 2904.5,1464.5 ; v1(2949.73,1082.91) 2956.82,1090 3642.91,1090 3722.91,1010 P5.13 ; v1(2970,575) 2970,620 2940.47,649.53 C26.1 2885,685 2840,730 ; 1490,1395 1686.73,1198.27
  Bottom Layer w8: v1(1496.69,880) 1460,916.69 1460,1115 v1(1575,1230) ; v1(1535,1440) 1535,1615 v1(1785,1865) ; v1(2265,1685) 2290,1660 C25.1 ; v1(2280,1755) 2360,1755 v1(2390,1725) 2430,1765 2530,1765 2570,1725 2570,1685 2600,1655 2625.28,1655 2672.48,1702.2 v1(2710,1702.2) ; C14.1 2300,554.5 2354.5,500 v1(2360,500) 2405,455 2541.81,455 2565.91,479.09 ; C27.1@2530,580.47 2530,515 2565.91,479.09 ; v1(2595,479.09) 2565.91,479.09 ; C24.1 2805,990 v1(2860,1045) ; C12.1 2805,1085 v1(2850,1130) 2850,1055 v1(2860,1045) ; v1(2894.37,444.37) 2915,465 2915,520 v1(2970,575) ; v1(2930,730) 2915,745 2915,990 v1(2860,1045) ; v1(2940,1430) 2940,1210 2915,1185 2915,1155 2949.73,1120.27 v1(2949.73,1082.91) 2911.82,1045 v1(2860,1045)
TMS_VDDA: C45.1 C46.1 P5.15 U2.36 U2.54 | length 4913
  Top Layer w8: U2.54 1683.94,1336.06 1638.31,1381.69 C45.1 1589.53,1525.47 1570,1545 1570,1605 1675,1710 v1(1775,1710) C46.1 1845.47,1664.53 1855,1655 1970,1655 1994.25,1630.75 U2.36 ; P5.15 3820,1265 3820,1335 3940,1455 4165,1455 4270,1560 4270,1910 4260,1920 4075,1920 3950,2045 v1(3950,2140)
  Bottom Layer w8: v1(1775,1710) 1885,1710 1890,1715 2015,1715 2230,1930 2320,1930 2485,2095 2485,2150 2510,2175 3915,2175 v1(3950,2140)
TMS_VDDIO: C15.1 C16.1 C17.1 C18.1 C19.1 C20.1 C21.1 C22.1 C29.1 C30.1 C31.1 C32.1 C36.1 C37.1 C38.1 C39.1 C40.1 C41.1 C42.1 C43.1 C44.1 P5.1 R9.2 U2.3 U2.11 U2.15 U2.20 U2.26 U2.62 U2.68 U2.75 U2.82 U2.88 U2.91 U2.99 U2.106 U2.114 U2.116 U2.119 U2.127 U2.138 U2.147 U2.152 U2.159 U2.168 | length 13711.8
  Top Layer w8: C17.1@1434.53,990 1454.53,970 1489.53,1005 v1(1545,1005) 1594.64,955.36 1686.57,955.36 1719.25,922.68 U2.75 ; C16.1@1439.53,1159.68 C43.1 1508.39,1255.2 1580,1183.58 ; C21.1@1624.53,735 C21.1 C20.1 1675,630 ; C21.1@1629.53,735 1667.68,735 v1@1695,762.32 ; v1(1695,760) v1@1695,762.32 ; v1@1695,770 v1@1695,762.32 ; U2.88 1711.77,666.77 1675,630 ; U2.82 1717.56,784.88 v1@1695,762.32 ; U2.68 1584.53,1060.47 v1(1580,1065) 1580,1183.58 ; U2.62 1585,1178.58 1580,1183.58 ; U2.91 1876.14,515 ; C32.1@1984.53,430 2033.62,479.09 2033.62,490 ; U2.99 2033.62,515 ; C31.1 2144.53,490.31 ; U2.106 v1(2171.42,517.2) 2144.53,490.31 ; U2.26 v1(2191.1,1675) ; v1(2305,1715) 2309.21,1710.79 U2.20 ; U2.114 2328.9,534.25 2331.57,531.57 ; v1(2340,250) 2315,275 2315,410 2377.01,472.01 ; U2.116 2368.27,543.27 2356.57,531.57 2331.57,531.57 ; U2.15 2407.64,1657.64 v1(2420,1670) 2490,1740 C40.1 C19.1 2595,1750 2643.86,1701.14 ; U2.119 2427.32,522.32 v1(2410,505) 2377.01,472.01 ; U2.11 v1(2486.38,1670) ; U2.127 2584.8,535.2 2615,505 v1(2630,505) ; U2.3 2643.86,1701.14 ; v1(2715,320) 2715,275 v1(2760,230) ; U2.138 2874.8,765.2 v1(2875,765) 2945,765 2962.83,747.17 2962.83,662.17 3000,625 v1(3000,539.53) ; U2.147 2831.42,942.36 ; U2.152 2821.1,1040.79 2831.42,1030.47 2831.42,942.36 ; U2.159 v1(2855,1178.58) ; U2.168 2764.76,1351.97 v1(2830,1351.97) ; v1(2845,1645) 2787.8,1702.2 2753.58,1702.2 2720.79,1735 2692.65,1735 2658.79,1701.14 2643.86,1701.14 ; v1(2885,880.47) 2885,888.78 2831.42,942.36 ; v1(2980,345) 2980,300 v1(2985,295) ; v1(3394.5,910) v1(3640,910) ; P5.1 4260,610 4299.53,649.53 4384.53,649.53 4551.85,816.85 R9.2 ; 1675,630 1675,605 1819.53,460.47 C22.1 1876.14,486.61 1876.14,515 ; 1876.14,515 2033.62,515 ; 2033.62,490 2033.62,515 ; 2033.62,490 2033.94,490.31 2144.53,490.31 ; 2331.57,531.57 2309.21,509.21 v1(2309.21,500) 2309.21,490.79 2327.99,472.01 2377.01,472.01
  Bottom Layer w8: C38.1 1605,1120 1580,1095 v1(1580,1065) 1580,1005 v1(1545,1005) 1545,770 1555,760 v1(1695,760) v1@1695,764.88 ; v1(2171.42,517.2) 2184.21,530 2205,530 ; C41.1@2195,1529.53 2191.1,1533.43 v1(2191.1,1675) 2215,1675 2255,1715 v1(2305,1715) 2385,1635 ; C29.1 2205,530 ; v1(2309.21,500) 2235,500 2205,530 ; v1(2340,250) 2395,195 2589.53,195 v1@2714.76,320.24 ; v1(2410,505) C39.1 ; v1(2420,1670) 2385,1635 ; C15.1 C18.1 2385,1635 ; C15.1@2486.38,1530.91 v1(2486.38,1670) ; C30.1 2635,575.47 2630,570.47 v1(2630,505) 2685,505 2715,475 v1@2715,320.47 ; C44.1 v1(2855,1178.58) 2825,1208.58 2825,1255 ; C42.1 v1@2830,1355.75 ; v1(2760,230) 2920,230 v1(2985,295) ; v1(2845,1645) 2845,1590 2785,1530 2785,1440.75 2830,1395.75 v1@2830,1355.75 ; v1(2885,880.47) 2744.06,880.47 C36.1 C37.1 2835,805 v1(2875,765) ; v1(2980,345) 2930,395 2930,500 2969.53,539.53 v1(3000,539.53) ; v1(3394.5,910) 3394.5,684.5 3355,645 3200,645 3110,735 3000,735 2970,705 2910,705 2875,740 v1(2875,765) ; v1(3640,910) 3640,705 v1(3665,680) 3685,660 3925,660 P5.1 ; 2825,1255 2665,1255 2495,1085 2495,929.5 2621.81,802.69 2621.81,768.44 2625.25,765 v1(2875,765) ; 2825,1255 2825,1310.75 2830,1315.75 v1(2830,1351.97) v1@2830,1355.75
TMS_VDDOSC: C28.1 C33.1 C34.1 C35.1 C47.1 P5.2 U2.72 U2.120 U2.125 | length 6129.6
  Top Layer w8: v1(1405.72,735) 1405.72,529.28 1600,335 v1(2085.47,335) ; C35.1@1458.27,1061.26 v1(1510,1061.26) 1528.74,1061.26 1608.27,981.73 U2.72 ; U2.120 2447.01,472.01 2370,395 v1(2370,335) 2425,280 C47.1 2384.53,154.53 2365,135 2365,70 2385,50 2880,50 2945,115 v1(2945,160) C28.1 2840,230 2635,435 2600,435 2545.43,489.57 U2.125 ; v1(2995,255) 3127.24,255 v1(3183.62,311.38)
  Bottom Layer w8: v1(1405.72,735) 1408.31,735 1438.31,765 1520,765 1520,910 1510,920 v1(1510,1061.26) ; v1(2085.47,335) 2085.47,254.53 2135,205 2135,105 2165,75 2226.56,75 2241.56,90 2241.56,216.56 2300,275 C34.1 2369.53,335.47 v1(2370,335) 2469.53,235.47 C33.1 ; v1(2945,160) 2945,235 2965,255 v1(2995,255) ; v1(3183.62,311.38) 3812.44,311.38 4080,578.94 4080,605 P5.2
TMS_VSSA: C45.2 C46.2 P5.16 U2.34 U2.52 | length 4797.7
  Top Layer w8: v1(1680,1645) 1645,1645 1638.31,1638.31 C45.2 1675.47,1584.53 1692.32,1567.68 1692.32,1389.68 1706.57,1375.43 U2.52 ; v1(1759.02,1770) 1898.43,1770 1904.53,1763.9 C46.2 1960,1710 ; v1(1960,1737.35) 1960,1710 ; U2.34 2033.62,1675 1998.62,1710 1960,1710 ; P5.16 3989.84,1424.84 4286.69,1424.84 v1(4380,1518.15)
  Bottom Layer w8: v1(1680,1645) 1680,1690.98 v1(1759.02,1770) ; v1(1960,1737.35) 2011.26,1737.35 2255,1981.09 2255,2015 2290,2050 2364.87,2050 2504.87,2190 4180,2190 4380,1990 v1(4380,1518.15)
TRST_DSC: R8.2 S2.3 U2.79 | length 1823
  Top Layer w8: v1(1620.75,825) 1639.69,843.94 U2.79 ; S2.3 3065,630 R8.2
  Bottom Layer w8: v1(1620.75,825) 1630.75,815 2465,815 2545,735 2775,735 2825,685 S2.3
TRST_MSP: P2.2 U1.83 | length 2062.1
  Top Layer w8: v1(1260,1830) 1260,1840 1360,1940 1945,1940 P2.2
  Top Layer w10: U1.83 v1@961.57,1036.57
  Bottom Layer w8: v1(965,1035) 825,1035 780,1080 780,1255 1260,1735 v1(1260,1830)
UART_CTS_1: P_J4.4 U1.70 | length 557.5
  Top Layer w8: U1.70 712.8,367.2 P_J4.4
UART_DEBUG_1: P2.4 U1.6 | length 1761
  Top Layer w8: U1.6 712.8,1491.34 739.61,1518.15 v1(778.15,1518.15) ; v1(1380,1895) 1400,1915 2120,1915 P2.4
  Bottom Layer w8: v1(778.15,1518.15) 878.15,1518.15 1235,1875 1360,1875 v1(1380,1895)
UART_DEBUG_2: P2.5 U1.7 | length 2025
  Top Layer w8: v1(675,1530) 693.11,1511.89 U1.7 ; v1(1215,1790) 1405,1790 1505,1890 2195,1890 P2.5
  Bottom Layer w8: v1(675,1530) 745,1460 950,1460 1215,1725 v1(1215,1790)
UART_DSC_DEBUG_1: P3.4 U2.18 | length 958.8
  Top Layer w8: U2.18 2348.58,1668.58 2365,1685 2365,1730 2335,1760 2335,1861.73 2383.27,1910 2874.5,1910 v1(2884.5,1900)
  Bottom Layer w8: v1(2884.5,1900) 2884.5,1994.5 P3.4
UART_DSC_DEBUG_2: P3.5 U2.19 | length 1024
  Top Layer w8: U2.19 2328.9,1691.1 2340,1702.2 2340,1730 2305,1765 2305,1860 2375,1930 2920,1930 P3.5
UART_DSC_MSP_IN: P5.6 U1.98 U2.131 | length 5445.6
  Top Layer w8: U1.98 941.85,1331.85 v1(946.1,1327.6) ; U2.131 2663.54,542.24 2740.79,465 v1(2825,465) ; P5.6 4175.43,1110 v1(4215.43,1150)
  Bottom Layer w8: 945,1206.57 945,1205.47 944.53,1205 1180,969.53 1180,855 1345,690 2715,690 2845,560 2845,485 v1(2825,465) 2825,355 2860,320 2995,320 3070,245 4150.43,245 4215.43,310 v1(4215.43,1150) ; 946.1,1206.57 v1(946.1,1327.6)
UART_DSC_MSP_OUT: P5.5 U1.99 U2.130 | length 4869.9
  Top Layer w8: U1.99 930,1351.54 943.46,1365 v1(975,1365) ; U2.130 2643.86,536.14 2740,440 2840.43,440 v1(2890,489.57)
  Bottom Layer w8: v1(975,1365) 975,1210 1205,980 1205,890.72 1385.72,710 2735,710 2890,555 ; v1(2890,489.57) 2890,555 ; P5.5 3925,960 3850,960 3795,905 3795,740 3755,700 3700,700 3670,730 3670,1016.1 3651.1,1035 3620,1035 3549.5,964.5 3549.5,744.5 3425,620 2955,620 2890,555
UART_DSC_XBEE_IN: P5.4 U2.12 U3.2 | length 2971.9
  Top Layer w8: U2.12 2466.69,1643.31 2450,1660 2450,1676.57 2478.43,1705 v1(2530,1705) ; v1(2680,1660.47) 2754.06,1660.47 2825,1589.53 v1(2825,1460) ; v1(2895,1120) 2910,1105 3626,1105 3679.9,1158.9 v1(4080,1158.9) ; P5.4 4080,910 4174.17,1004.17 U3.2
  Bottom Layer w8: v1(2530,1705) 2530,1693.58 2592.83,1630.75 2650.28,1630.75 v1(2680,1660.47) ; v1(2825,1460) 2868.63,1416.37 2868.63,1254.53 2880,1243.15 2880,1183.28 2894,1169.28 2894,1121 v1(2895,1120) ; P5.4 4080,1015 v1(4080,1158.9)
UART_DSC_XBEE_OUT: P5.3 U2.10 U3.3 | length 3795.7
  Top Layer w8: U2.10 2506.06,1641.06 2545,1680 2555,1680 2570,1695 v1(2600,1695) ; v1(3145,2055) 3790,2055 3920,1925 v1(3920,1710) ; P5.3 4100,810 4215.43,925.43 U3.3
  Bottom Layer w8: v1(2600,1695) 2625,1720 2675,1720 2715,1760 2715,1895 2635,1975 2635,2010.69 2669.31,2045 2700,2045 2734.53,2079.53 2734.53,2124.53 2750,2140 2805,2140 2830,2115 2830,2075 2860,2045 3135,2045 v1(3145,2055) ; v1(3920,1710) 3985,1710 4125,1570 4125,960 P5.3
UART_RTS_1: P_J4.5 U1.80 | length 1513.9
  Top Layer w8: P_J4.5 725,255 1140,255 1210,325 1210,875 1107.48,977.52 U1.80
UART_RX_1: P_J1.4 U1.35 | length 1728.1
  Top Layer w10: v3(180,1165.27) 185.27,1165.27 214.06,1194.06 U1.35
  Bottom Layer w8: v3(180,1165.27) 164.73,1165.27 100,1230 100,2020 150,2070 710,2070 P_J1.4
UART_TX_1: P_J1.3 U1.34 | length 1381.1
  Top Layer w10: U1.34 228.58,1213.74 195,1247.32 195,1660 295,1760 v3(635,1760)
  Bottom Layer w8: v3(635,1760) 715,1760 825,1870 825,1955 P_J1.3
VCORE: C8.2 C9.1 L1.1 U1.12 | length 636.6
  Top Layer w10: C8.2@401.78,1568.19 401.78,1677.5 401.78,1700 C9.1 ; C9.1@420.3,1703.27 635.43,1703.27 L1.1 635.43,1520 594.68,1479.25 U1.12
VSW: L1.2 U1.14 | length 241.6
  Top Layer w10: U1.14 555.31,1504.69 530,1530 530,1615.43 L1.2
pads on no net: ADC.8 ADC.11 ADC.14 ADC.20 S1.3 S1.4

## Polygon pours and split planes (outlines as drawn)
GND on Bottom Layer "Bottom Layer-GND" (solid, pour order 0): -155,2325 5305,2325 5305,0 4860,0 -155,0
GND on Top Layer "Top Layer-GND" (solid, pour order 2): -155,0 -155,2325 5305,2325 5305,0

## Keep-outs
Keep-Out Layer:
  lines w10: -155,0 -155,2205 -155,2215 -155,2325 5305,2325 5305,2215 5305,0 0,0 -155,0

## Silkscreen, mask and mechanical layers (free items; w line width, h text height)
Top Overlay:
  text "Gator Stream Tx V2.0 / Kole and Mark" at 4395,2105 h35

## Text inside footprints (layer, text, board x,y; h text height)
P2: Top Overlay "1" at 1805,1980 h50; Top Overlay "5" at 2365,1980 h50; Top Overlay "10" at 2365,2080 h50; Top Overlay "6" at 1805,2080 h50
P3: Top Overlay "1" at 2485,1975 h50; Top Overlay "5" at 3045,1975 h50; Top Overlay "10" at 3045,2075 h50; Top Overlay "6" at 2485,2075 h50
P4: Top Overlay "1" at 3494.5,1410 h50; Top Overlay "5" at 3469.5,2005 h50; Top Overlay "10" at 3334.5,2000 h50; Top Overlay "6" at 3379.5,1405 h50
P5: Top Overlay "9" at 3865,485 h50; Top Overlay "1" at 3980,485 h50; Top Overlay "8" at 3960,1390 h50; Top Overlay "16" at 3831,1390 h50
P_J1: Top Overlay "30" at 20,1870 h50; Top Overlay "10" at 15,1975 h50; Top Overlay "21" at 1145,1875 h50; Top Overlay "1" at 1155,1993.38 h50
P_J4: Top Overlay "11" at 50,180 h50; Top Overlay "31" at 45,280 h50; Top Overlay "20" at 1150,180 h50; Top Overlay "40" at 1150,275 h50
U2: Top Overlay "*" at 2755.52,1631.61 h60 r270
U3: Top Overlay "XBEE_PRO" at 4640,72.91 h40; Top Overlay "1" at 4285,1057.91 h40; Top Overlay "10" at 4270,292.91 h40; Top Overlay "11" at 5235,287.91 h40; Top Overlay "20" at 5240,1047.91 h40